# EAGLE board _PortExpanderCP2130_copia (EAGLE 7.2.0)
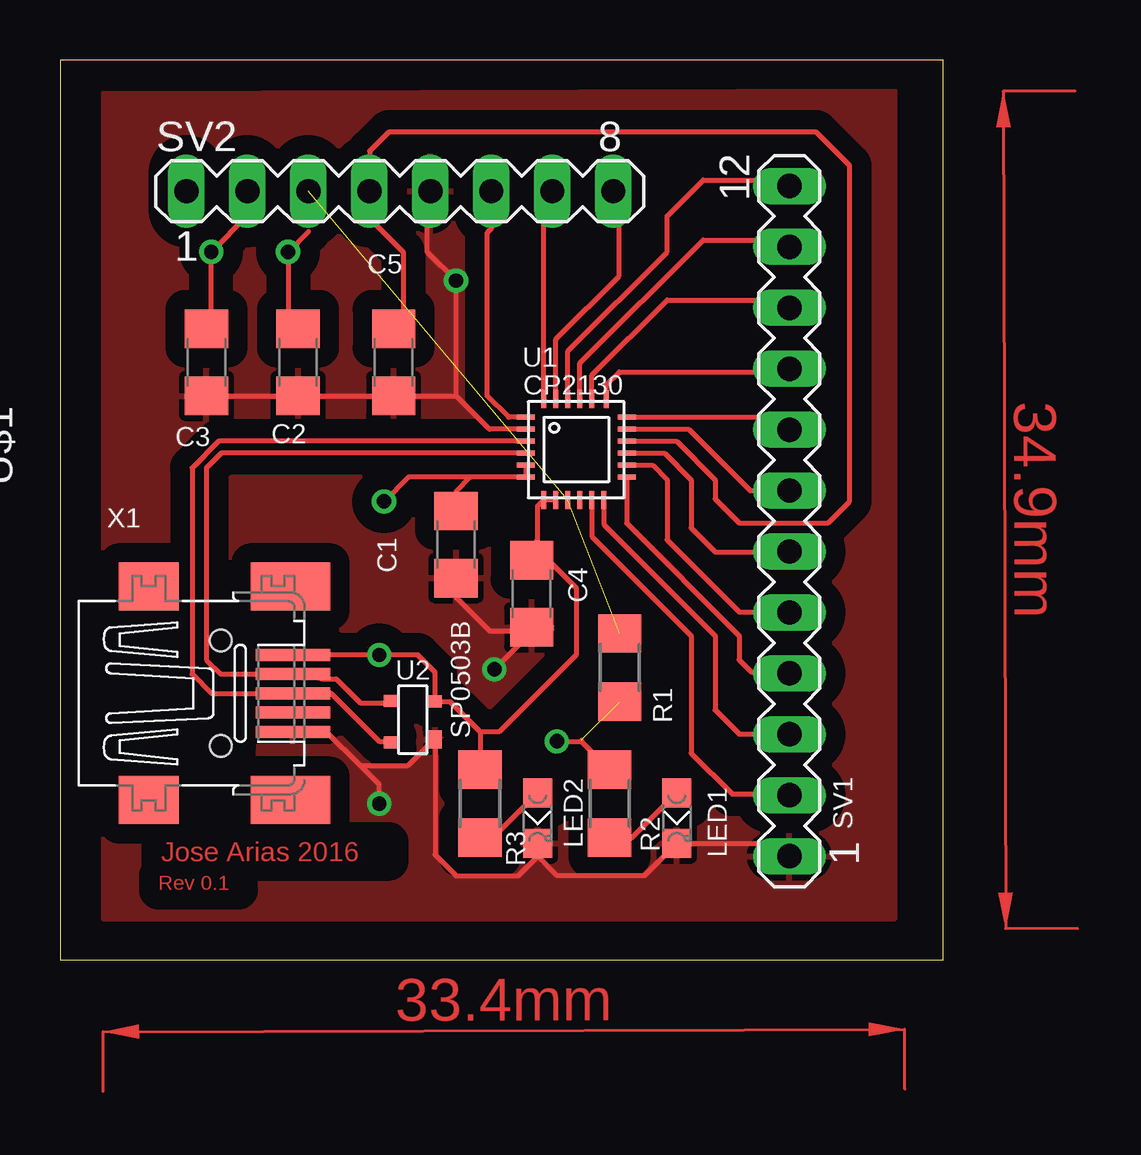
[diagram p0: board, top side]
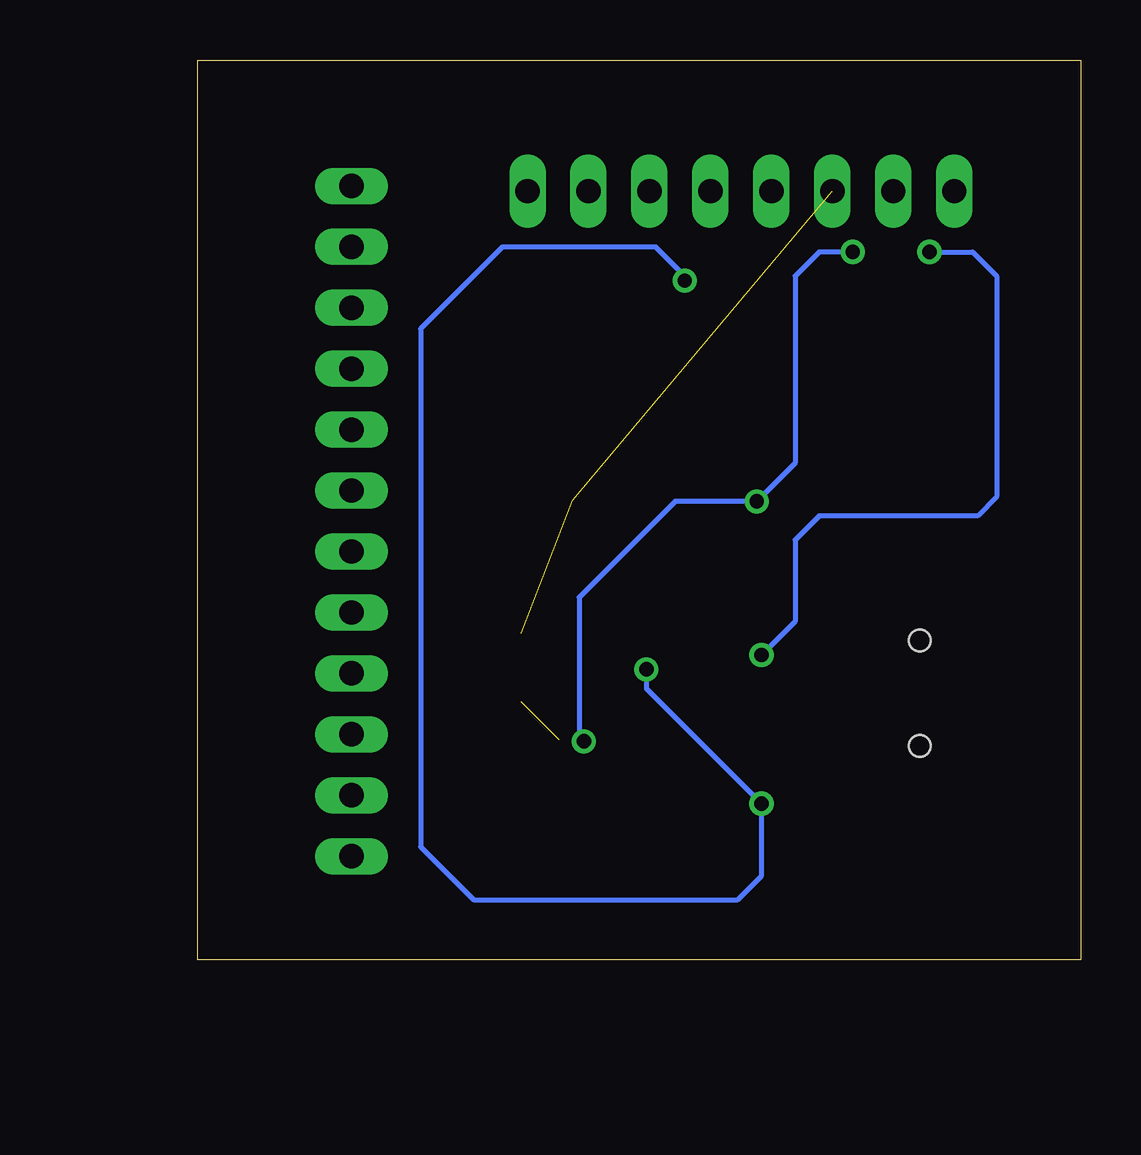
[diagram p1: board, bottom side, seen from below]

Size 36.8 x 37.5 mm. Coordinates in mm from the lower left corner, seen from the top.
Outline: 0,0 36.8,0 36.8,37.5 0,37.5 0,0
Copper layers (1*16): Top 0.035mm / dielectric 1.5mm / Bottom 0.035mm
Design rules "default": minimum track width 10mil, minimum drill 24mil, track to track 8mil, track to pad 8mil, pad to pad 8mil, via to via 8mil, smd to smd 8mil, copper to edge 40mil, drill to drill 8mil, minimum pad ring 10mil, minimum via ring 8mil, stop-mask expansion 4mil, vias tented up to drill 0mil, thermal gap 10mil
Net classes: 0 default: width 0.152 mm; 1 USB_VBUS: width 0.254 mm; 2 GND: width 0.508 mm, clearance 0.127 mm

## Footprints (pad centres in the part's own frame; a part is rotated, then mirrored left to right if it is on the bottom)
C1206 = smd 1.6 x 1.8: 1 -1.4,0; 2 1.4,0
LED_0805 = smd 1.2 x 1.2: A 0,-1.05; C 0,1.05
R1206 = smd 1.6 x 1.803: 1 -1.422,0; 2 1.422,0
MA12-1 = drill 1.016 long: 1 -13.97,0; 2 -11.43,0; 3 -8.89,0; 4 -6.35,0; 5 -3.81,0; 6 -1.27,0; 7 1.27,0; 8 3.81,0; 9 6.35,0; 10 8.89,0; 11 11.43,0; 12 13.97,0
MA08-1 = drill 1.016 long: 1 -8.89,0; 2 -6.35,0; 3 -3.81,0; 4 -1.27,0; 5 1.27,0; 6 3.81,0; 7 6.35,0; 8 8.89,0
QFN-24 = smd 0.75 x 0.2: 1 -2.1,1.35; 2 -2.1,0.85; 3 -2.1,0.35; 4 -2.1,-0.15; 5 -2.1,-0.65; 6 -2.1,-1.15; 13 2.1,-1.15; 14 2.1,-0.65; 15 2.1,-0.15; 16 2.1,0.35; 17 2.1,0.85; 18 2.1,1.35 | smd 0.2 x 0.75: 7 -1.35,-2.1; 8 -0.85,-2.1; 9 -0.35,-2.1; 10 0.15,-2.1; 11 0.65,-2.1; 12 1.15,-2.1; 19 1.25,2.1; 20 0.65,2.1; 21 0.15,2.1; 22 -0.35,2.1; 23 -0.85,2.1; 24 -1.35,2.1
SOT143 = smd 0.76 x 0.55: 1 -0.82,-0.93 | smd 0.5 x 0.55: 2 0.76,-0.93; 3 0.79,0.94; 4 -0.94,0.94
MICRO-USB-RCPT-1981568 = smd 0.25 x 1.8: 1 1.3,2.93; 2 0.65,2.93; 3 0,2.93; 4 -0.65,2.93; 5 -1.3,2.93 | smd 1.6 x 1.4: 6 -3.75,2.5; 11 3.75,2.5 | smd 1.45 x 1.3: 7 -3.75,0; 10 3.75,0 | smd 1.9 x 1.9: 8 -1.2,0; 9 1.2,0
32005-201 = smd 3.1 x 0.5: 1 3,1.6; 2 3,0.8; 3 3,0; 4 3,-0.8; 5 3,-1.6 | smd 2.5 x 2: M1 -3,-4.45; M2 -3,4.45 | smd 3.3 x 2: M3 2.9,4.45; M4 2.9,-4.45 | hole 0.9: 0,2.2; 0,-2.2

## Placement (x,y rotation side)
C1  4.7uF  [C1206]  16.5,17.3 270 top
C2  0.1uF  [C1206]  9.92,24.9 270 top
C3  4.7uF  [C1206]  6.1,24.9 270 top
C4  0.1uF  [C1206]  19.65,15.25 270 top
C5  4.7uF  [C1206]  13.9,24.9 270 top
LED1  [LED_0805]  25.7,5.9 180 top
LED2  [LED_0805]  19.9,5.9 180 top
R1  4.7K  [R1206]  23.32,12.17 270 top
R2  1K  [R1206]  22.9,6.5 270 top
R3  1K  [R1206]  17.5,6.5 270 top
SV1  [MA12-1]  30.39,18.28 90 top
SV2  [MA08-1]  14.16,32.03 0 top
U1  CP2130  [QFN-24]  21.51,21.26 0 top
U2  SP0503B  [SOT143]  14.7,10 90 top
U$1  CONN-RCPT-MICRO-USB-1981568  [MICRO-USB-RCPT-1981568]  -7.5,18.9 270 top  (outside the outline)
X1  MINI-USB-32005-201  [32005-201]  6.7,11.1 0 top

## Library data of the parts
C1-C5 = rcl
LED1 LED2 = eagle-book
R1-R3 = resistor
SV1 SV2 = con-lstb; OC_FARNELL: unknown; OC_NEWARK: unknown
U1 = ExarLib
U2 U$1 = HCloudLib
X1 = con-cypressindustries; OC_FARNELL: unknown; OC_NEWARK: unknown

## Nets
GND: C1.2 C2.2 C3.2 C4.2 C5.2 LED1.C LED2.C SV1.1 SV2.5 U1.2 U2.1 X1.5
GPIO0: SV1.12 U1.22
GPIO1: SV1.11 U1.21
GPIO2: SV1.10 U1.20
GPIO3: SV1.9 U1.19
GPIO4: SV1.8 U1.18
GPIO5: SV1.7 U1.17
GPIO6: SV1.6 U1.15
GPIO7: SV1.5 U1.14
GPIO8: SV1.4 U1.13
GPIO9: SV1.3 U1.12
GPIO10: SV1.2 U1.11
MISO: SV2.7 U1.24
MOSI: SV2.8 U1.23
N$4: LED2.A R3.2
N$5: LED1.A R2.2
RESET: R1.1 SV2.3 U1.9
SCK: SV2.6 U1.1
USB_D+: U1.3 U2.4 X1.3
USB_D-: U1.4 U2.3 X1.2
USB_VBUS: C3.1 C4.1 R3.1 SV2.2 U1.7 U1.8 U2.2 X1.1
VDD: C1.1 C2.1 R1.2 R2.1 U1.5 U1.6
VPP: C5.1 SV2.4 U1.16

## Tracks (layer width: path | path; a pad name or v marks a point on that pad's centre or on a via)
GND  (via drill 0.6)
  Top 0.2: 12.5,8.1 14.5,8.1 15.5,9.1 U2.1 15.63,4.37 16.5,3.5 19.1,3.5 19.9,4.3 | 12.5,8.1 11.1,9.5 X1.5 | C3.2 C2.2 C5.2 16.5,23.5 | U1.2 17.89,22.11 16.5,23.5 | 16.5,23.5 v16.5,28.3 15.3,29.5 15.3,31.9 SV2.5 | LED2.C 19.9,4.3 | 19.9,4.3 20.7,3.5 24.35,3.5 LED1.C 29.85,4.85 SV1.1 | v18.1,12.1 19.65,13.65 C4.2 19.6,13.7 17.9,13.7 16.5,15.1 C1.2 16.5,16.3 16.7,16.5 16.7,16.3 16.3,15.9 | v13.3,6.5 13.3,7.3 12.5,8.1
  Bottom 0.2: v18.1,12.1 18.1,11.3 v13.3,6.5 13.3,3.5 14.3,2.5 25.3,2.5 27.5,4.7 27.5,26.3 24.1,29.7 17.7,29.7 16.5,28.5 v16.5,28.3
  pour Top (isolate 0.813): 1.8,36.1 1.8,1.7 34.8,1.7 34.8,36.2
GPIO0
  Top 0.2: U1.22 21.16,25.36 25.3,29.5 25.3,31 26.8,32.5 30.14,32.5 SV1.12
GPIO1
  Top 0.2: U1.21 21.66,24.86 26.8,30 30.1,30 SV1.11
GPIO2
  Top 0.2: U1.20 22.16,24.36 25.3,27.5 30.06,27.5 SV1.10
GPIO3
  Top 0.2: U1.19 22.76,23.96 23.3,24.5 30.26,24.5 SV1.9
GPIO4
  Top 0.2: U1.18 29.87,22.61 SV1.8
GPIO5
  Top 0.2: U1.17 26.19,22.11 28.75,19.55 SV1.7
GPIO6
  Top 0.2: U1.15 25.19,21.11 26.3,20 26.3,18 27.3,17 SV1.6
GPIO7
  Top 0.2: U1.14 24.69,20.61 25.3,20 25.3,17.5 28.33,14.47 SV1.5
GPIO8
  Top 0.2: U1.13 23.61,18.19 28.3,13.5 28.3,12.5 28.8,12 30.32,12 SV1.4
GPIO9
  Top 0.2: U1.12 22.66,18.14 27.3,13.5 27.3,10.4 28.3,9.4 SV1.3
GPIO10
  Top 0.2: U1.11 22.16,17.64 26.3,13.5 26.3,8.6 28,6.9 30.34,6.9 SV1.2
MISO
  Top 0.2: U1.24 20.16,31.68 SV2.7
MOSI
  Top 0.2: U1.23 20.66,25.86 23.3,28.5 23.3,31.78 SV2.8
N$4
  Top 0.2: R3.2 18.03,5.08 LED2.A
N$5
  Top 0.2: R2.2 23.83,5.08 LED1.A
RESET  (2 unrouted)
SCK
  Top 0.2: U1.1 18.69,22.61 17.8,23.5 17.8,30.3 17.97,30.47 SV2.6
USB_D+
  Top 0.2: U2.4 13.7,9.1 13.3,9.1 11.3,11.1 X1.3 6.3,11.1 5.5,11.9 5.5,20.5 6.61,21.61 U1.3
USB_D-
  Top 0.2: 10.9,11.7 10.7,11.9 X1.2 | 10.9,11.7 11.5,11.7 12.5,10.7 13.7,10.7 U2.3 | 10.9,11.7 X1.2 | U1.4 6.71,21.11 6.1,20.5 6.1,12.5 6.7,11.9 X1.2
USB_VBUS  (via drill 0.6)
  Top 0.2: U1.8 U1.7 19.9,18.9 19.9,17.5 19.65,17.25 C4.1 19.7,16.7 20.3,16.7 21.5,15.5 21.5,12.7 18.3,9.5 17.5,9.5 | C3.1 6.3,26.5 v6.3,29.5 7.81,31.01 SV2.2 | 17.5,9.5 16.24,10.76 U2.2 15.63,11.97 14.9,12.7 v13.3,12.7 | 17.5,9.5 R3.1 | v13.3,12.7 X1.1 | v13.3,12.7 13.5,12.7
  Bottom 0.2: v6.3,29.5 4.5,29.5 3.5,28.5 3.5,19.3 4.3,18.5 10.9,18.5 11.9,17.5 11.9,14.1 v13.3,12.7
VDD  (via drill 0.6)  (1 unrouted)
  Top 0.2: U1.5 U1.6 17.1,20.11 | C2.1 9.5,26.72 v9.5,29.5 10.35,30.35 | 17.1,20.11 14.51,20.11 v13.5,19.1 | v20.7,9.1 21.72,9.1 | 21.72,9.1 R2.1 | 21.72,9.1 21.72,9.15 | C1.1 16.5,19.51 17.1,20.11
  Bottom 0.2: v9.5,29.5 10.9,29.5 11.9,28.5 11.9,20.7 v13.5,19.1 16.9,19.1 20.9,15.1 20.9,9.3 v20.7,9.1
VPP
  Top 0.2: U1.16 25.69,21.61 27.3,20 27.3,19.2 28.3,18.2 32,18.2 32.9,19.1 32.9,33.1 31.5,34.5 13.7,34.5 12.9,33.7 SV2.4 12.89,30.91 14.3,29.5 14.3,26.7 C5.1
(copper drawn outside any net)
  shapes: Top area x2

## Text on the board
Top: Jose Arias 2016 | Rev 0.1